# Altium PCB DCDCProtoPos.PcbDoc
Units mil, origin at the board's own origin, x right, y up, seen from the top; angles counter-clockwise.
Board outline 2319 x 598 mil, 2 copper layers (Top Layer, Bottom Layer); 32 components, 22 nets, 95 pads, 32 vias.
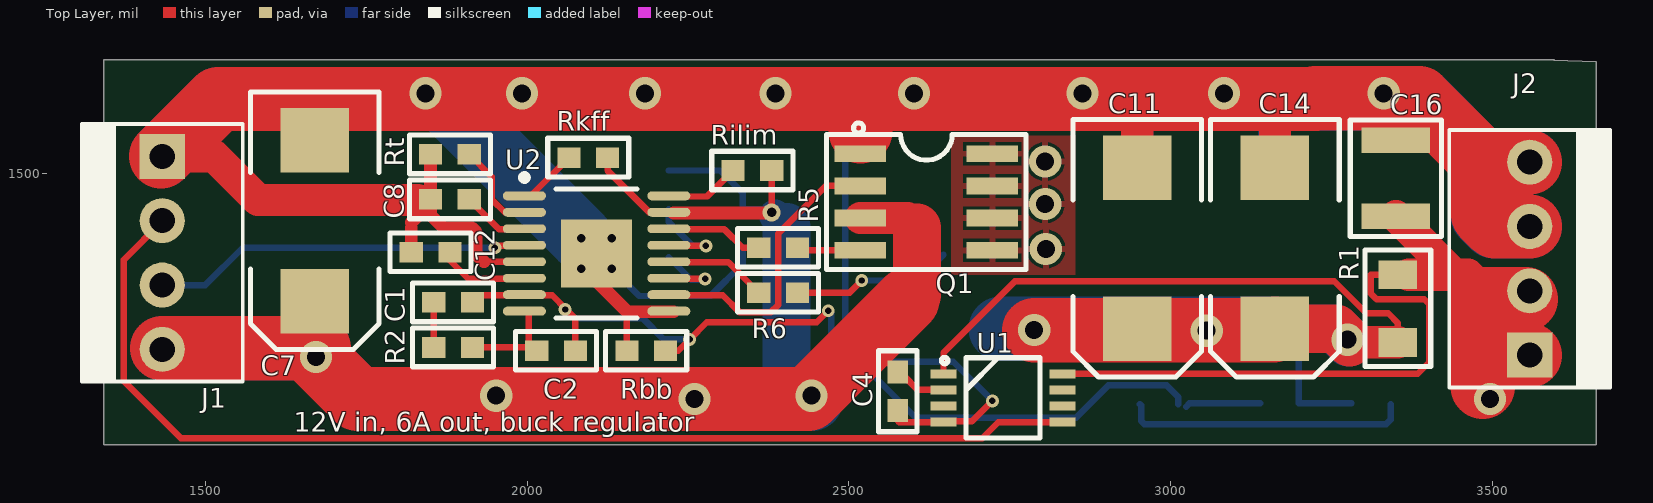
[diagram p0: Top Layer view]
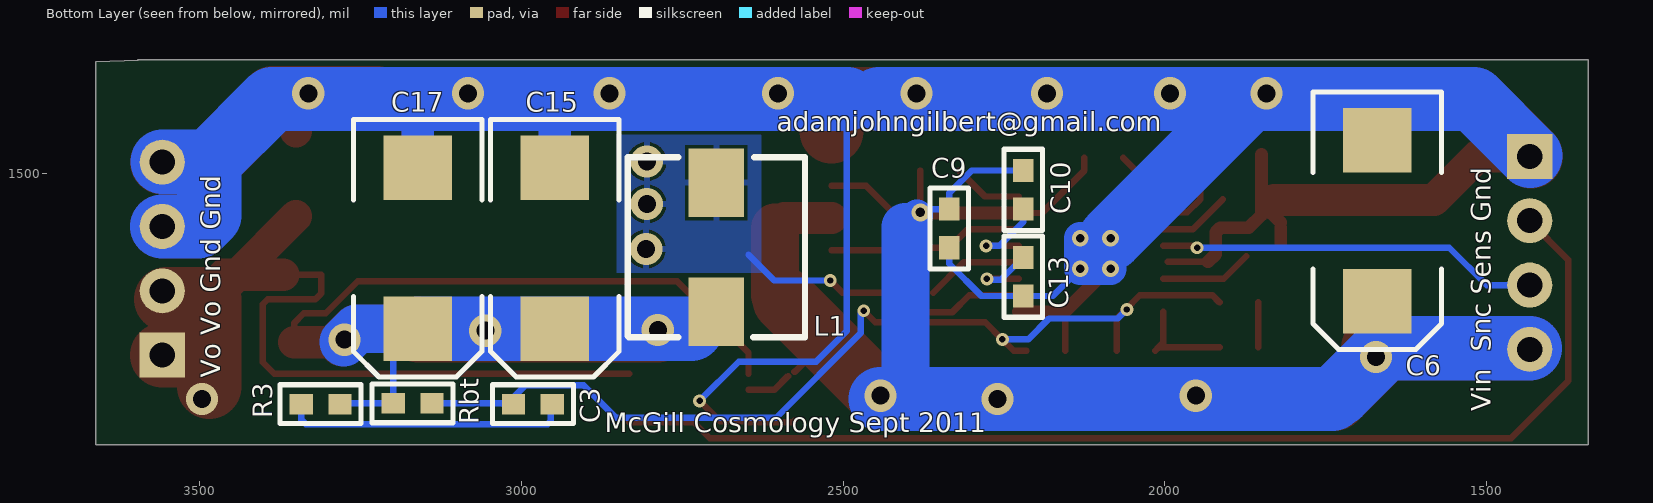
[diagram p1: Bottom Layer view, seen from below]

## Layer stack, top to bottom
Top Layer: signal copper 1.4
Dielectric: dielectric 12.6, FR-4, Dk 4.8
Bottom Layer: signal copper 1.4

## Board outline
1342,1079 1342,1677 3596,1677 3595,1676 3661,1674 3661,1079

## Design rules (kind name [scope] priority, off if disabled: settings)
Clearance [All] p1: gap=5
MinimumSolderMaskSliver [All] p1: minsoldermaskwidth=0
PolygonConnect [All] p1: connectstyle=Relief reliefconductorwidth=10 reliefentries=4 polygonreliefangle="90 Angle"
RoutingVias [All] p1: holewidth=28 width=20 viastyle="Through Hole" minholewidth=10 minwidth=20 maxholewidth=28 maxwidth=50
SilkToSilkClearance [All] p1: silktosilkclearance=0
SilkscreenOverComponentPads [All] p1: minsilkscreentomaskgap=3
SolderMaskExpansion [All] p1: expansion=4
Width [All] p1: maxlimit=500 minlimit=10 preferedwidth=10
25 further rules are at their usual default settings.

## Components (designator, comment, footprint, x,y, rotation, side; value= is the part's Value field where it differs from the comment)
C1 "250pF" 0603 1855,1300 r0 top
C2 "40pF" 0603 2015,1225 r0 top
C3 "250pF" 0603 3012,1142 r180 bottom
C4 "0.1uF" 0603 2576,1192 r270 top
C6 "33uF, 35V, T495X336K035ATE100" TCASE-D 1670,1302 r90 bottom
C7 "33uF, 35V, T495X336K035ATE100" TCASE-D 1670,1302 r90 top
C8 "1uF, 50V, X5R" 0603 1910,1460 r180 top
C9 "1uF, 50V, X5R" 0603 2335,1385 r90 bottom
C10 "1uF, 50V, X5R" 0603 2220,1505 r270 bottom
C11 "68uF, 20V, T495D686K020ZTE070" TCASE-D 2948,1259 r90 top
C12 "3.3nF" 0603 1820,1378 r0 top
C13 "1uF, 50V, X5R" 0603 2220,1370 r270 bottom
C14 "68uF, 20V, T495D686K020ZTE070" TCASE-D 3162,1259 r90 top
C15 "68uF, 20V, T495D686K020ZTE070" TCASE-D 2948,1259 r90 bottom
C16 "TMK325BJ226MM-T (Ceramic)" 1210 3350,1434 r90 top
C17 "68uF, 20V, T495D686K020ZTE070" TCASE-D 3161,1259 r90 bottom
J1 "Header 4" CON4M 1433,1527 r270 top
J2 "Header 4" CON4M 3558,1218 r90 top
L1 "Inductor" Wurth744311220 2697,1486 r270 bottom
Q1 "Si4564DY" SO8 2518,1531 r0 top
R1 "5mOhm" 1206 3353,1238 r90 top
R2 "Res0603" 0603 1915,1230 r180 top
R3 "Res0603" 0603 3342,1142 r180 bottom
R5 "Res0603" 0603 2360,1385 r0 top
R6 "Res0603" 0603 2360,1315 r0 top
Rbb "Res0603" 0603 2155,1225 r0 top
Rbt "Res0603" 0603 3139,1143 r0 bottom
Rilim "Res0603" 0603 2320,1505 r0 top
Rkff "Res0603" 0603 2125,1525 r180 top
Rt "Res0603" 0603 1850,1530 r0 top
U1 "AD8219" MSOP-8 2647,1189 r0 top
U2 "TPS40061" TSOP65P640X120_HS-16N 2108,1376 r0 top

## Footprints (in the part's own frame and the unit in brackets; to place one, negate y for a bottom-side part, rotate by r counter-clockwise, add the part's x,y. Pads: shape width x height; smd on the part's side, far side on the other; paste and mask are expansions set on the pad)
0603 [mil]
  rect 36x32 smd: 1(0,0) 2(60,0)
  silkscreen extent -33,-30 93,30
1206 [mil]
  rect 45x60 smd: 1(0,0) 2(105,0)
  silkscreen extent -37,-51 144,51
1210 [mm]
  rect 1x2.7 smd: 1(0,0) 2(3,0)
  silkscreen extent -0.8,-1.8 3.8,1.8
CON4M [mil]
  rect 70x70 hole 39: 1(0,0)
  round 70 hole 39: 2(100,0) 3(200,0) 4(300,0)
  silkscreen extent -50,-125 350,125
MSOP-8 [mil]
  rect 40x14 smd: 1(0,0) 2(0,-25) 3(0,-50) 4(0,-75) 5(185,-75) 6(185,-50) 7(185,-25) 8(185,0)
  silkscreen extent -3,-100 150,26
SO8 [mil]
  rect 80x26 smd: 1(0,0) 2(0,-50) 3(0,-100) 4(0,-150) 5(205,-150) 6(205,-100) 7(205,-50) 8(205,0)
  silkscreen extent -52,-180 258,48
TCASE-D [mm]
  rect 2.55x2.7 smd: 1(0,0) 2(6.35,0)
  silkscreen extent -1.91,-2.54 8.25,2.54
TSOP65P640X120_HS-16N [mm] "TSOP, 16-Leads, Body 5.1x4.5mm (max), Pitch 0.65mm, IPC Medium Density"
  oval 1.7x0.35 smd: 1(-2.85,2.275) 2(-2.85,1.625) 3(-2.85,0.975) 4(-2.85,0.325) 5(-2.85,-0.325) 6(-2.85,-0.975) 7(-2.85,-1.625) 8(-2.85,-2.275) 9(2.85,-2.275) 10(2.85,-1.625) 11(2.85,-0.975) 12(2.85,-0.325) 13(2.85,0.325) 14(2.85,0.975) 15(2.85,1.625) 16(2.85,2.275)
  rect 2.8x2.7 smd: 17(0,0)
  silkscreen extent -2.97,-2.55 1.6,3.12, body extent -2.25,-2.55 2.25,2.55, height 1.2
Wurth744311220 [mm] "Inductor"
  rect 2.7x2.2 smd: 1(0,0) 2(5.1,0)
  silkscreen extent -1,-3.5 6.1,3.5

## Part data
C1 C2 C3 C4 C12: library part Cap0603, "Capacitor, Ceramic, 0603"
C6 C7 C11 C14 C15 C17: library part CapPol3, "CAP TANT 68UF 20V 10% 2917 70mOhm"
C8 C10 C13: library part Cap0603, "Capacitor, Ceramic, 0603 - UMK107BJ105KA-T"
C9: library part Cap0603, "UMK107BJ105KA-T"
C16: library part "Cap Pol3", "CAP CER 100UF 10V X5R 1210 20%"
J1 J2: "Header, 0.1\"  4-Pin straight"
L1: library part Wurth744311220
R1: library part Res1206, "Resistor"
R2 R3 R5 R6 Rbb Rbt Rilim Rkff Rt: "Resistor"
U1: "Current sense"
U2: library part TPS40061PWPR, "Buck Controller"

## Via types
v1: diameter 50, hole 28, Top Layer to Bottom Layer, 19 vias
v2: diameter 20, hole 10, Top Layer to Bottom Layer, 8 vias
v3: diameter 25.98, hole 12.99, Top Layer to Bottom Layer, tented top, 4 vias
v4: diameter 28, hole 15, Top Layer to Bottom Layer, 1 vias

## Nets (pads, with @x,y where several pads share a name; then routed paths per layer and width w, separated by ;. In a path a pad name is that pad's centre, name@x,y a point inside that pad or via, vN(x,y) a via of type N, cw(c..) or ccw(c..) an arc to the next point about the centre after c; other vN are vias at no path point)
GND: C4.2 C6.2 C7.2 C8.2 C9.1 C11.2 C12.1 C13.2 C14.2 C15.2 C16.2 C17.2 J1.1 J2.3 J2.4 Q1.1 Rbb.1 Rt.1 U1.4 U2.5 U2.9 U2.17 | length 7952.4
  Top Layer w10: C7.2 1670,1616 1670,1631 ; v1(1842,1625) 1850,1617 v1@1850,1616 ; 1932.8,1363.2 U2.5 ; Rbb.1 2155,1285 ; C4.2@2576,1116 2578,1114 U1.4 2648,1115 2691,1115 v2(2723,1147)
  Top Layer w20: C12.1@1820,1390 1820,1416 ; 1820,1424 C8.2@1844,1448 ; Rt.1 C8.2 1850,1436 1870,1416 1914,1416 1921,1409 1921,1375 1932.8,1363.2 ; U2.17@2095.2,1363.2 U2.17 2108,1332.87 2155.43,1285.43 ; 2155,1285 2155.43,1285.43 ; U2.9@2227.2,1285.43 2155.43,1285.43
  Top Layer w50: J1.1@1431,1527 J1.1 1514,1527 1582,1459 1830,1459 ; C11.2 2948,1616 2948,1631 ; C14.2 3162,1616 3162,1619 3166,1623 ; C16.2@3350,1566 3350,1617 3356,1623
  Top Layer w100: J1.1@1431,1527 1520,1616 1670,1616 1850,1616 2386,1616 2948,1616 3162,1616 3225,1616 ; 2518,1566 2518,1606 ; 3225,1617 3350,1617 3386.43,1617 3485.43,1518 ; J2.3 3504,1418 3485.43,1436.57 3485.43,1518 ; J2.4 3485.43,1518
  Bottom Layer w10: v3(2131.62,1352.38) 2174,1310 C13.2 2285,1310 2335,1360 C9.1 ; 2466,1616 2494,1616 2494,1256 2542,1208 2662,1208 v2(2723,1147)
  Bottom Layer w50: C15.2 2948,1612 2952,1616 ; C17.2 3161,1609 3168,1616 ; v3(2084.38,1352.38) v3(2084.38,1399.62) v3(2131.62,1399.62) v3(2131.62,1352.38) v3(2084.38,1352.38)
  Bottom Layer w100: J1.1@1432,1528 1520,1616 1868,1616 ; v3(2084.38,1399.62) 1868,1616 ; 2444,1616 2386,1616 1868,1616 ; 2494,1616 2952,1616 3168,1616 3387.43,1616 3485,1518.43 ; J2.4@3557.57,1518.43 3485,1518.43 ; J2.3 3502,1418 3485,1435 3485,1518.43
  other v1: 1992,1625 2183,1625 2386,1625 2601,1625 2863,1625 3083,1625 3331,1625
INP: C11.1 C14.1 C15.1 C17.1 L1.2 R1.1 R3.2 Rbt.2 U1.1 | length 2179.2
  Top Layer w10: U1.1 2647,1222 2758,1333 3254,1333 3304,1283 3338,1283 3353,1268 R1.1
  Top Layer w50: v1@3278,1238 R1.1
  Top Layer w75: C14.1 3257,1259 v1@3278,1238
  Top Layer w100: v1(2788,1257) 3160,1257 C14.1
  Bottom Layer w10: C17.1 3199,1221 Rbt.2 R3.2@3281,1143
  Bottom Layer w75: C17.1 3256,1259 3276,1239 v1@3276,1238
  Bottom Layer w100: L1.2@2736.21,1259 C15.1 C17.1
  other v1: 3275,1242 3056,1256
ISENSE: J1.2 U1.5 | length 1779.8
  Top Layer w10: J1.2@1433.5,1426.5 1373,1366 1373,1178 1462,1089 2707,1089 2732,1114 U1.5
NetC1_1: C1.1 R2.2 | length 70
  Top Layer w10: R2.2 C1.1
NetC2_1: C2.1 R2.1 U2.8 | length 160.5
  Top Layer w10: R2.1 C2.1@2010,1230 ; U2.8@2002.8,1285.43 2002.8,1237.2 C2.1@2010,1230 ; C2.1 C2.1@2010,1230
NetC3_2: C3.2 R3.1 | length 443.8
  Bottom Layer w10: C3.2 2954,1140 2954,1116 2959,1111 3335,1111 3342,1118 R3.1
NetC8_1: C8.1 U2.3 | length 112.1
  Top Layer w10: C8.1 1956.61,1413.39 U2.3@2002.8,1413.39
NetC10_2: C10.2 U2.13 | length 143.8
  Top Layer w10: U2.13@2227.2,1387.8 v2(2277.8,1387.8)
  Bottom Layer w10: C10.2 2220,1425 2257.2,1387.8 v2(2277.8,1387.8)
NetC12_2: C12.2 U2.6 | length 143.7
  Top Layer w10: C12.2@1873.5,1371.5 1908.39,1336.61 U2.6@2002.8,1336.61
NetC13_1: C13.1 U2.11 | length 126
  Top Layer w10: U2.11@2227.2,1336.61 v2(2276.61,1336.61)
  Bottom Layer w10: C13.1 2255,1335 2275,1335 v2(2276.61,1336.61) v2@2280,1340
NetL1_1: L1.1 Q1.5 Q1.6 Q1.7 Q1.8 R6.2 | length 251.4
  Top Layer w10: R6.2 2501,1315 v2(2520,1334)
  Bottom Layer w10: v2(2520,1334) 2607,1334 2647,1374
  other v1: 2806,1383 2805,1453 2805,1519
NetQ1_2: Q1.2 U2.10 | length 447.8
  Top Layer w10: U2.10@2227.2,1311.02 2303.98,1311.02 2330,1285 2379,1285 2390,1296 2390,1407 2464,1481 Q1.2
NetQ1_4: Q1.4 R5.2 | length 99.7
  Top Layer w10: R5.2 2424,1381 Q1.4
NetR5_1: R5.1 U2.14 | length 144.6
  Top Layer w10: U2.14@2227.2,1413.39 2306.61,1413.39 2335,1385 R5.1
NetR6_1: R6.1 U2.12 | length 152.3
  Top Layer w10: U2.12@2227.2,1362.2 2312.8,1362.2 R6.1
NetRilim_1: Rilim.1 U2.16 | length 109.5
  Top Layer w10: U2.16@2227.2,1464.57 2279.57,1464.57 Rilim.1
NetRkff_2: Rkff.2 U2.1 | length 87.2
  Top Layer w10: U2.1@2002.8,1464.57 2003.23,1465 2005,1465 Rkff.2
NetRt_2: Rt.2 U2.2 | length 151
  Top Layer w10: Rt.2 1945,1495 1945,1460 1965,1440 1994.77,1440 1995.8,1438.98 U2.2@2002.8,1438.98
SYNC: J1.3 U2.4 | length 590
  Top Layer w10: v2(1950,1385) v2@1952.8,1387.8 ; v2@1957.8,1387.8 U2.4@2002.8,1387.8
  Bottom Layer w10: J1.3 1500,1327 1558,1385 v2(1950,1385)
VBIAS: C1.2 C2.2 C3.1 Rbb.2 Rbt.1 U2.7 | length 1503.1
  Top Layer w10: C1.2 1926.02,1311.02 2038.98,1311.02 v2@2061,1289 ; v2(2059,1289) v2@2061,1289 ; C2.2 2075,1275 v2@2061,1289 ; Rbb.2 2235,1225 v2(2252.5,1242.5) 2279,1269 2450,1269 v2(2468,1287)
  Bottom Layer w10: v2(2059,1289) 2073,1275 2180,1275 2212.5,1242.5 v2(2252.5,1242.5) ; v2@2472.5,1282.5 2472.5,1252.5 2604,1121 2853,1121 2903,1171 2994,1171 3012,1153 C3.1 ; C3.1@3024,1138 3029,1143 Rbt.1
VIN: C4.1 C6.1 C7.1 C9.2 C10.1 J1.4 Q1.3 Rilim.2 Rkff.1 U1.2 U2.15 | length 3474.5
  Top Layer w10: Rkff.1 2125,1505 2191.02,1438.98 U2.15@2227.2,1438.98 ; v4(2380,1440) Rilim.2 ; 2527,1240 2575,1192 C4.1 ; C4.1@2585.5,1185.5 2607,1164 U1.2
  Top Layer w20: U2.15@2227.2,1438.98 v4@2380,1438.98
  Top Layer w50: Q1.3 2591,1431 2606,1416
  Top Layer w75: 2606,1311 2606,1416
  Top Layer w100: J1.4@1433,1228.57 v1@1676.57,1228.57 ; v1(1672,1215) 1737,1150 v1(2260,1150) 2437,1150 v1(2442,1155) 2527,1240 2591,1304
  Bottom Layer w10: C10.1 2300,1505 2335,1470 C9.2 2375,1445 v4(2380,1440) v4@2385,1435
  Bottom Layer w50: v4@2385,1435 2403,1417
  Bottom Layer w75: 2403,1150 2403,1417
  Bottom Layer w100: J1.4@1433,1228.57 1658.43,1228.57 1729,1158 ; 1740,1150 v1(2260,1150) 2390,1150 ; 2403,1150 v1@2442,1150
  other v1: 1952,1155
VO: C16.1 J2.1 J2.2 R1.2 U1.8 | length 1507.5
  Top Layer w10: U1.8 3384,1189 3402,1207 3402,1297 3394,1305 3320,1305 3311,1314 3311,1343 R1.2 R1.2@3370,1343
  Top Layer w50: C16.1 3441,1343 ; R1.2@3370,1343 3441,1343 ; 3485,1320 3462,1343 3441,1343 ; J2.2@3552,1305 3479,1305 3441,1343
  Top Layer w100: v1@3485,1169 3485,1305 J2.2@3552,1305 ; 3487,1218 J2.1
  other v1: 3496,1150
pads on no net: U1.3 U1.6 U1.7

## Polygon pours and split planes (outlines as drawn)
NetL1_1 on Top Layer "TopOverlay-No Net" (solid, pour order 4): 2659,1559 2659,1343 2852,1343 2852,1559
NetL1_1 on Bottom Layer "TopOverlay-No Net" (solid, pour order 6): 2852,1563 2852,1346 2627,1346 2627,1564

## Silkscreen, mask and mechanical layers (free items; w line width, h text height)
Top Overlay:
  text "12V in, 6A out, buck regulator" at 1637,1099 h30
Bottom Overlay:
  text "adamjohngilbert@gmail.com" at 2603,1566 h30
  text "Vo Vo Gnd Gnd" at 3468,1183 h30 r270
  text "Vin  Snc Sens Gnd" at 1494,1131 h30 r270
  text "McGill Cosmology Sept 2011" at 2870,1098 h30